# Altium PCB powerRegulator.PcbDoc
Units mil, origin at the board's own origin, x right, y up, seen from the top; angles counter-clockwise.
Board outline 2710 x 2100 mil, 2 copper layers (Top Layer, Bottom Layer), stack 62.8 mil thick; 15 components, 31 nets, 65 pads, 15 vias.
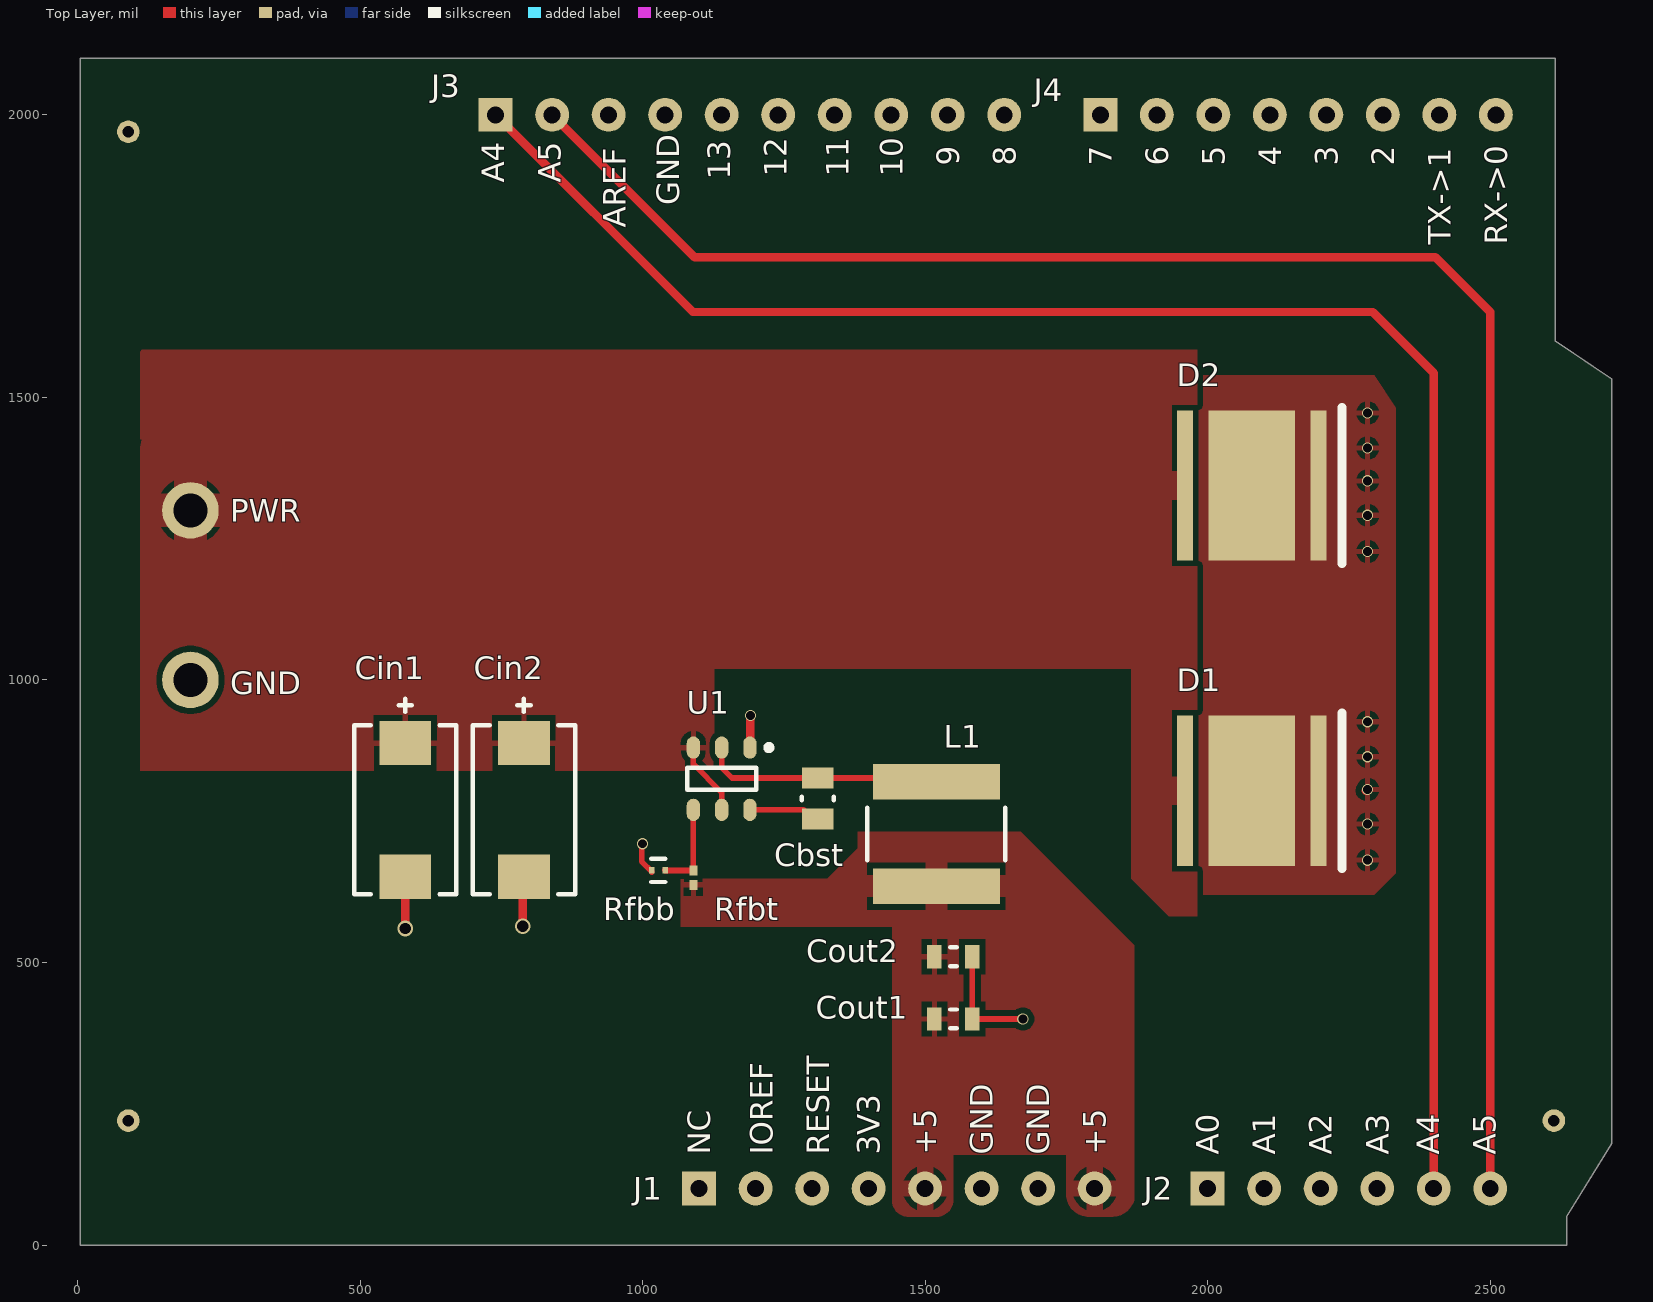
[diagram p0: Top Layer view]
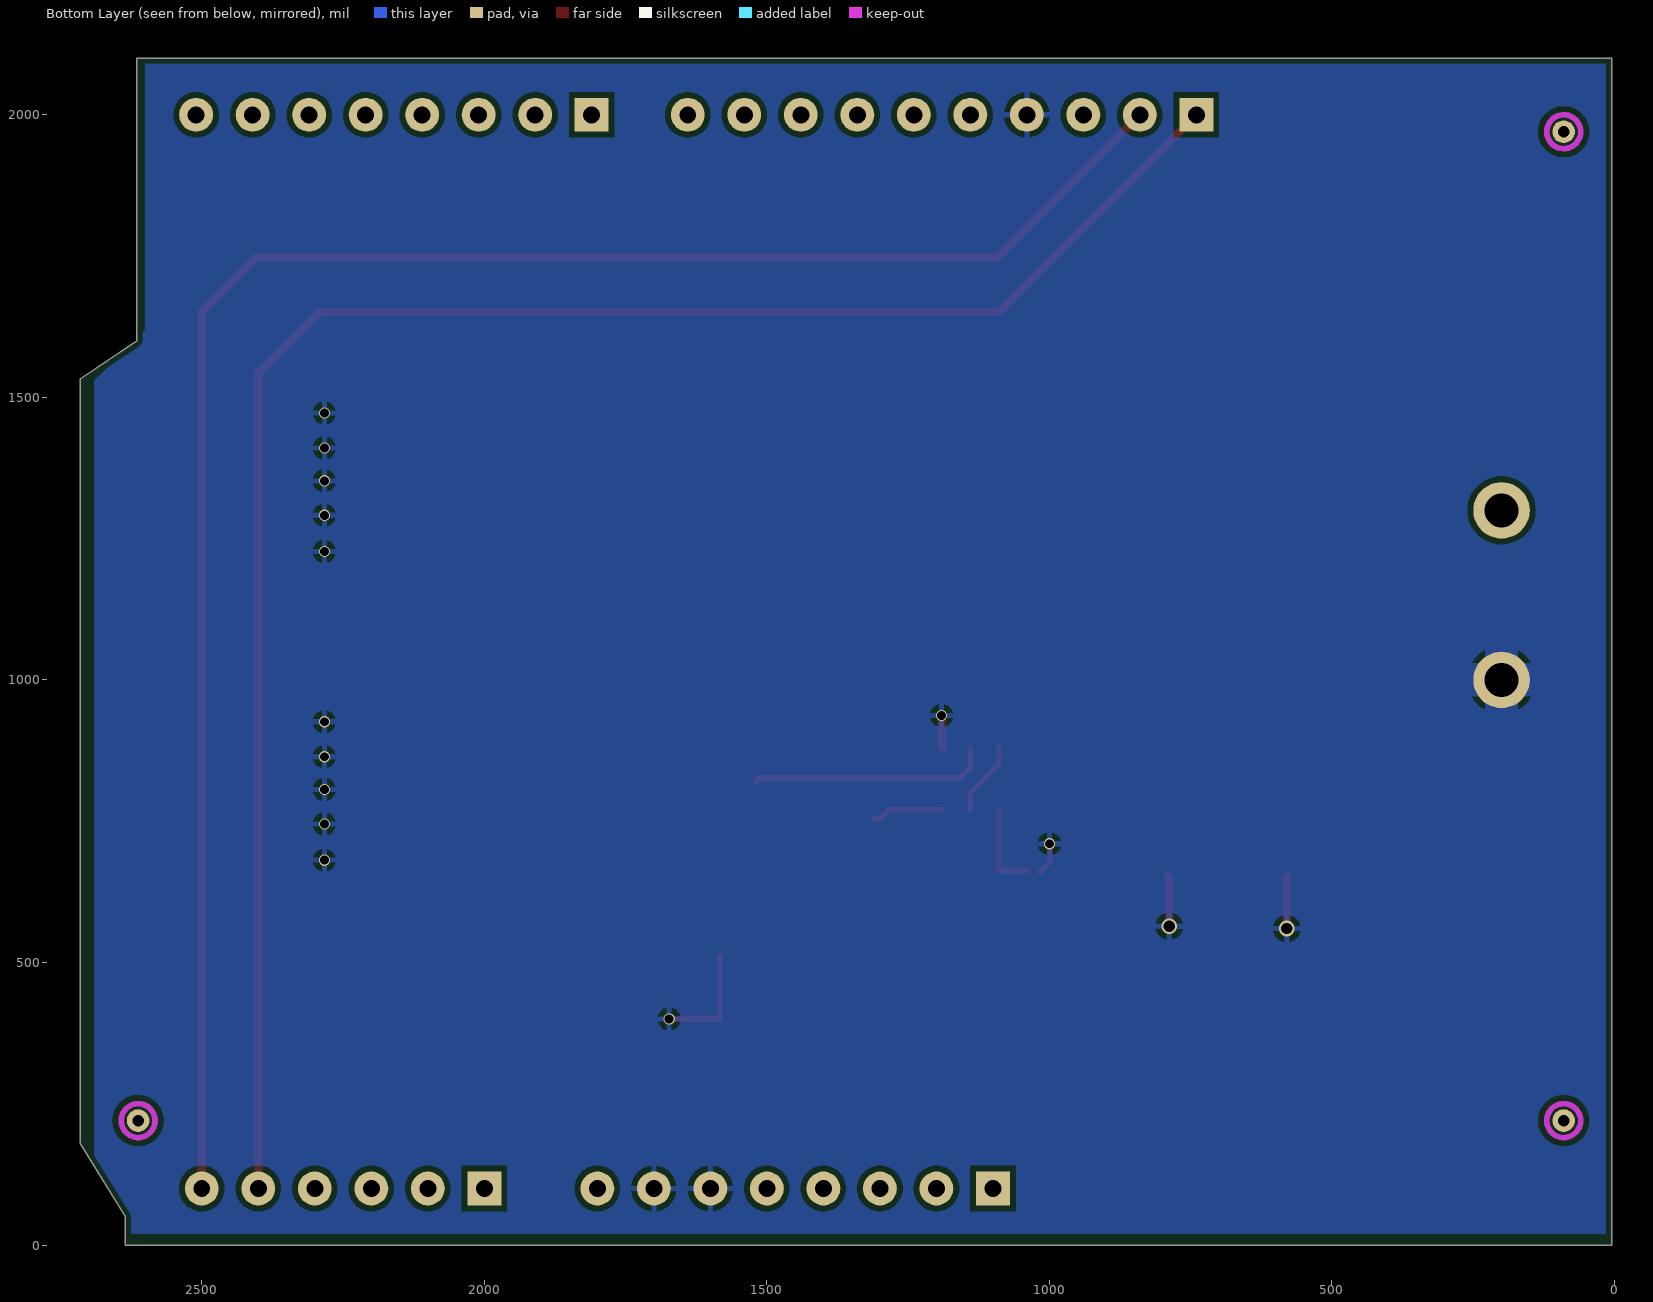
[diagram p1: Bottom Layer view, seen from below]

## Layer stack, top to bottom
Top Solder: solder mask 0.4, Solder Resist, Dk 3.5
Top Layer: signal copper 1.4
Dielectric 1: dielectric 60, FR-4, Dk 4.8
Bottom Layer: signal copper 1.4
Bottom Solder: solder mask 0.4, Solder Resist, Dk 3.5

## Board outline
5,0 2635,0 2635,50 2715,180 2715,285 2715,1532.35 2615,1600 2615,1655 2615,2100 5,2100

## Design rules (kind name [scope] priority, off if disabled: settings)
BoardOutlineClearance [All] p1: gap=10 ignorepadtopadclearanceinfootprint=FALSE
Clearance [All] p1: gap=10 ignorepadtopadclearanceinfootprint=TRUE except(0: Arc-Hole Track-Hole SMDPad-Hole THPad-Hole Via-Hole Fill-Hole Poly-Hole Region-Hole Text-Hole; 4: Arc-THPad)
PolygonConnect [All] p1: connectstyle=Relief reliefconductorwidth=10 reliefentries=4 polygonreliefangle="90 Angle" airgapwidth=10
RoutingVias [All] p1: holewidth=20 width=28 viastyle="Through Hole" minholewidth=12 minwidth=20 maxholewidth=28 maxwidth=40
SolderMaskExpansion [All] p1: expansion=4 istentingtop=FALSE
Width [All] p1: maxlimit=20 minlimit=10 preferedwidth=15
30 further rules are at their usual default settings.

## Components (designator, comment, footprint, x,y, rotation, side; value= is the part's Value field where it differs from the comment)
Cbst "CC0805KRX7R8BB104" FP-CC0805-0_85-MFG 1310,790 r270 top value="100 nF"
Cin1 "T491D106K035AT" FP-T491D106K035AT-MFG 580,770 r90 top
Cin2 "T491D106K035AT" FP-T491D106K035AT-MFG 790,770 r90 top
Cout1 "C1608X5R1A226M080AC" CAPC1608X100X20ML10 1550,400 r180 top
Cout2 "C1608X5R1A226M080AC" CAPC1608X100X20ML10 1550,510 r180 top
D1 "MKRAWT-00-0000-0D0HG235H" CREE-MK-R-2_V 2078,804 r0 top
D2 "MKRAWT-00-0000-0D0HG235H" CREE-MK-R-2_V 2078,1344 r0 top
J1 "SSQ-108-03-T-S" SSQ-108-03-T-S-Footprint-1#1 1450,100 r0 top
J2 "SSQ-106-03-T-S" SSQ-108-03-T-S-Footprint-1#2 2000,100 r0 top
J3 "SSQ-110-03-T-S" SSQ-108-03-T-S-Footprint-1#3 1190,2000 r0 top
J4 "SSQ-108-03-T-S" SSQ-108-03-T-S-Footprint-1#1 2160,2000 r0 top
L1 "NR6028T4R7M" FP-NR6028-MFG 1520,727.48 r270 top
Rfbb "ERJ-1GNF1002C" FP-ERJ1G-MFG 1028,663 r0 top value=10kΩ
Rfbt "CRCW020156K2FNED" RESC0603X28X15NL05T05 1090,650 r270 top
U1 "TPS562200DDCR" SOIC127P280X110-6N 1140,825.12 r270 top

## Footprints (in the part's own frame and the unit in brackets; to place one, negate y for a bottom-side part, rotate by r counter-clockwise, add the part's x,y. Pads: shape width x height; smd on the part's side, far side on the other; paste and mask are expansions set on the pad)
CAPC1608X100X20ML10 [mm] "Chip Capacitor, 2-Leads, Body 1.70x0.90mm, IPC Low Density"
  rect 0.65x1.05 smd: 1(-0.85,0) 2(0.85,0)
  silkscreen extent -0.15,-0.43 0.15,0.43, body extent -0.85,-0.45 0.85,0.45, height 1
CREE-MK-R-2_V [mm] "SMD, 2-Leads, Body 7x7mm, Thermal Pad 3.9x6.76mm"
  rect 0.7x6.76 smd: 1(-3,0) 2(3,0)
  rect 3.9x6.76 smd: 3(0,0)
  silkscreen extent 4.05,-3.5 4.05,3.5, body extent -3.5,-3.5 3.5,3.5, height 4.1
FP-CC0805-0_85-MFG [mm]
  rect 0.95x1.4 smd paste+0 mask+0: 1(-0.925,0) 2(0.925,0)
  silkscreen extent -0.08,-0.72 0.08,0.72, body extent -1.6,-1.05 1.6,1.05, height 0.25
FP-ERJ1G-MFG [mm]
  rect 0.25x0.3 smd paste+0 mask+0: 1(-0.3,0) 2(0.3,0)
  silkscreen extent -0.32,-0.53 0.32,0.53, body extent -0.53,-0.27 0.53,0.27, height 0.25
FP-NR6028-MFG [mm]
  rect 1.6x5.7 smd paste+0 mask+0: 1(-2.35,0) 2(2.35,0)
  silkscreen extent -1.17,-3.1 1.17,3.1, body extent -3.25,-3.2 3.25,3.2, height 0.25
FP-T491D106K035AT-MFG [mm]
  rect 1.99x2.33 smd paste+0 mask+0: 1(-3.01,0) 2(3.01,0)
  silkscreen extent -3.8,-2.3 5,2.3, body extent -4.13,-2.42 4.13,2.42, height 0.25
RESC0603X28X15NL05T05 [mm] "Chip Resistor, 2-Leads, Body 0.60x0.30mm, IPC Medium Density"
  rect 0.45x0.35 smd: 1(-0.325,0) 2(0.325,0)
  body extent -0.33,-0.17 0.33,0.18, height 0.28
SOIC127P280X110-6N [mm] "SOIC, 6-Leads, Body 2.90x1.60mm, Pitch 1.27mm, IPC Medium Density"
  oval 1x0.6 smd: 1(-1.4,1.27) 2(-1.4,0) 3(-1.4,-1.27) 4(1.4,-1.27) 5(1.4,0) 6(1.4,1.27)
  silkscreen extent -1.52,-1.55 0.5,2.25, body extent -1.91,-1.55 1.9,1.55, height 1.1
SSQ-108-03-T-S-Footprint-1#1 [mil]
  rect 60x60 hole 30: 1(-350,0)
  round 60 hole 30: 2(-250,0) 3(-150,0) 4(-50,0) 5(50,0) 6(150,0) 7(250,0) 8(350,0)
SSQ-108-03-T-S-Footprint-1#2 [mil]
  rect 60x60 hole 30: 1(0,0)
  round 60 hole 30: 2(100,0) 3(200,0) 4(300,0) 5(400,0) 6(500,0)
SSQ-108-03-T-S-Footprint-1#3 [mil]
  rect 60x60 hole 30: 1(-450,0)
  round 60 hole 30: 2(-350,0) 3(-250,0) 4(-150,0) 5(-50,0) 6(50,0) 7(150,0) 8(250,0) 9(350,0) 10(450,0)

## Part data
Cbst: library part CMP-1036-04410-2, "CAP CER 0.1UF 25V X7R 0805", Capacitance="100 nF", Manufacturer=Yageo, Package=CC0805-0.85, Temperature="-30°C to +85°C", Temperature Characteristic=X7R, Temperature Range High=+85°C, Temperature Range Low=-30°C, Tolerance=0.1, Voltage Rating="25 V", Automotive=No, Category=Cap, ComponentLink2Description=Datasheet, ComponentLink2URL=http://www.yageo.com/documents/recent/UPY-GPHC_Y5V_6.3V-to-50V_8.pdf, Device Class L1="Passive Components", Device Class L2=Capacitors, Device Class L3="Ceramic Capacitors", Digikey Description="CAP CER 0.1UF 25V X7R 0805", Footprint Url=http://www.yageo.com/exep/pages/download/literatures/UPY-C_GEN_24.pdf, Height=0.95mm, Ipc Land Pattern Name=CAPC200125X85, Lead Free=Yes, Manufacturer Part Number=CC0805KRX7R8BB104, Material=Ceramic, Mouser Description="Multilayer Ceramic Capacitors MLCC - SMD/SMT 100nF 25V X7R 10%", Octopart=https://octopart.com/cc0805krx7r8bb104-yageo-39467766, RoHS=TRUE
Cin1 Cin2: library part CMP-2000-07580-2, "CAP TANT 10UF 10% 35V 2917", Capacitance=10uF, Case Code (Imperial)=2917, Case Code (Metric)=7343, Dielectric Material=Tantalum, ESR (Equivalent Series Resistance)=1R, Leakage Current=3.5uA, Max Operating Temperature=125°C, Min Operating Temperature=-55°C, Package Quantity=1, Tolerance=20%, Voltage=35V, Case/Package=2917, Depth=4.3mm, Dissipation Factor=6%, Features="General Purpose", Height=2.8mm, Height - Seated (Max)=0.122inch, Lead Free="Lead Free", Length=7.3mm, Life (Hours)=2000Hour, Mount="Surface Mount", Number of Pins=2, Packaging="Tape and Reel", Polarity=Polar, Radiation Hardening=No, REACH SVHC="No SVHC", RoHS Compliant=Yes, Termination=SMD/SMT, Voltage Rating=35V, Voltage Rating (DC)=35V, Width=4.3mm
Cout1 Cout2: library part CMP-2000-05441-1, "Chip Capacitor, 22 uF, +/- 20%, 10 V, -55 to 85 degC, 0603 (1608 Metric), RoHS, Tape and Reel", Capacitance=22µF, Manufacturer=TDK, Operating Temperature=-55degC~85degC, Package / Case=0603(1608Metric), Package Description="2-Pin Surface Mount Device, Body 1.6 x 0.8 mm", Package Reference=603, PCN Part Number=MLCCPartNumberChange30/Nov/2012, Ratings=-, Standard Package=1, Temperature Coefficient=X5R, Tolerance=±20%, Voltage - Rated=10V, Applications=GeneralPurpose, Category=Capacitors, Datasheet URL=http://download.siliconexpert.com/pdfs/2015/4/21/15/54/45/779/tdk_/manual/37024850441143360mlcc_commercial_general_en.pdf, Datasheet Version=Mar-15, Design Resources=20WNon-IsolatedBuckLEDDriverUsingPLLNK460KG, Family=CeramicCapacitors, Features=-, Height - Seated (Max)=-, Kits=445-9014-KIT-ND-KITMLCC100PF-22UF060310-50V, Lead Spacing=-, Lead Style=-, Manufacturer URL=http://www.tdk.com/, Mounting Type=SurfaceMount,MLCC, Online Catalog=CSeries,GeneralPurpose, Other Names=445-9077-1, Packaging=CutTape(CT), Product Training Modules=CSeriesGeneralApplicationsSEAT,CCV,andTVCLDesignToolsGuidetoReplacinganElectrolyticCapacitorwithanMLCC, RoHS Information=RoHSCertificate-MLCC, Series=C, Size / Dimension="0.063\"Lx0.031\"W(1.60mmx0.80mm)", Thickness (Max)="0.035\"(0.90mm)"
D1 D2: library part CMP-2100-00977-1, "LED, White, 12 V, 2-Pin SMD, RoHS, Tape and Reel"
J1 J4: library part CMP-00003-2, "Headers & Wire Housings Tiger Buy Socket Strip with Square Tails, 0.100 Pitch", Color=Black, Connector Type=Receptacle, Contact Material=Bronze, Contact Plating=Tin, Contact Type="Female Socket", Gender=Female, Height=8.51mm, Housing Color=Black, Housing Material=Plastic, Lead Free="Lead Free", Length=20.8mm, Mount="Through Hole", Number Of Contacts=8, Number of Positions=8, Number Of Rows=1, Packaging=Bulk, Pitch=0.1inch, Radiation Hardening=No, RoHS Compliant=Yes, Series=SSQ, Termination=Solder, Width=2.41mm
J2: library part CMP-00006-2, "Headers & Wire Housings Tiger Buy Socket Strip with Square Tails, 0.100 Pitch", Color=Black, Connector Type=Receptacle, Contact Material=Bronze, Contact Plating=Tin, Contact Type="Female Socket", Gender=Female, Height=8.51mm, Housing Color=Black, Housing Material=Plastic, Lead Free="Lead Free", Length=15.8mm, Mount="Through Hole", Number Of Contacts=6, Number of Positions=6, Number Of Rows=1, Packaging=Bulk, Pitch=0.1inch, Radiation Hardening=No, RoHS Compliant=Yes, Series=SSQ, Termination=Solder, Width=2.41mm
J3: library part CMP-00007-1, "Headers & Wire Housings Tiger Buy Socket Strip with Square Tails, 0.100 Pitch", Color=Black, Package Quantity=1, Connector Type=Receptacle, Contact Material=Bronze, Contact Plating=Tin, Contact Type="Female Socket", Gender=Female, Height=8.51mm, Housing Color=Black, Housing Material=Plastic, Lead Free="Lead Free", Length=25.9mm, Mount="Through Hole", Number Of Contacts=10, Number of Positions=10, Number Of Rows=1, Packaging=Bulk, Pitch=0.1inch, Radiation Hardening=No, RoHS Compliant=Yes, Series=SSQ, Termination=Solder, Width=2.41mm
L1: library part CMP-14484-000037-2, "SMD Power Inductors 4.7uH ±20% 2.7A 40.3mΩ", Case/Package=2424, Current Rating=3A, DC Resistance (DCR)=40.3mR, Inductance=4.7uH, Inductance Tolerance=20%, Max Operating Temperature=120°C, Min Operating Temperature=-25°C, Package Quantity=2000, Resistor Type=Wirewound, Saturation Current=2.7A, Self Resonant Frequency=39MHz, Test Frequency=100kHz, Core Material=Ferrite, Depth=6.2mm, Halogen Free="Halogen Free", Height=2.8mm, Height - Seated (Max)=0.11inch, Lead Free="Lead Free", Length=0.236inch, Max DC Current=3A, Mount="Surface Mount", Number of Pins=2, Packaging="Tape and Reel", Radiation Hardening=No, RMS Current (Irms)=3A, RoHS Compliant=Yes, Series=NR, Shielding=Shielded, Termination=SMD/SMT, Tolerance=20%, Width=0.236inch
Rfbb: library part CMP-2004-03445-2, "RES SMD 10K OHM 1% 1/20W 0201", Manufacturer="Panasonic Electronic Components", Package=ERJ1G, Power Rating=0.05W, Resistance=10kΩ, Temperature="-55°C to +125°C", Temperature Coefficient=200ppm/°C, Temperature Range High=+125°C, Temperature Range Low=-55°C, Tolerance=1%, Voltage Rating=25V, Automotive=Yes, Automotive Grade="Grade 1", Category=Res, ComponentLink2Description=Datasheet, ComponentLink2URL=https://industrial.panasonic.com/cdbs/www-data/pdf/RDA0000/AOA0000C304.pdf, Composition="Thick Film", Device Class L1="Passive Components", Device Class L2=Resistors, Device Class L3="Chip SMD Resistors", Digikey Description="RES SMD 10K OHM 1% 1/20W 0201", Footprint Url=https://industrial.panasonic.com/cdbs/www-data/pdf/RDA0000/DMA0000COL17.pdf, Height=0.26mm, Lead Free=Yes, Manufacturer Part Number=ERJ-1GNF1002C, Mouser Description="Thick Film Resistors - SMD 0201 10Kohm 1% HalogenFree AEC-Q200", Octopart=https://octopart.com/erj-1gnf1002c-panasonic-55419697, RoHS=TRUE, Series=ERJ
Rfbt: library part CMP-2004-00723-1, Manufacturer="Vishay Dale", Part Number=CRCW020156K2FNED
U1: library part CMP-00005-3, "Buck Switching Regulator IC Positive Adjustable 0.765V 1 Output 2A SOT-23-6 Thin, TSOT-23-6", Case/Package=SOT-23-6, Max Input Voltage=17V, Max Operating Temperature=125°C, Max Output Current=2A, Max Output Voltage=7V, Min Input Voltage=4.5V, Min Operating Temperature=-40°C, Min Output Voltage=765mV, Package Quantity=3000, Quiescent Current=230uA, Switching Frequency=650kHz, Contact Plating=Tin, Lead Free="Lead Free", Mount="Surface Mount", Number of Outputs=1, Number of Pins=6, Operating Supply Voltage=17V, Output Configuration=Positive, Output Current=2A, Output Type=Adjustable, Output Voltage=7V, Packaging="Tape and Reel", Radiation Hardening=No, Reach SVHC Compliant=Yes, RoHS Compliant=Yes, Series="D-CAP2™, Eco-Mode™", Synchronous Rectifier=Yes, Weight=0.00127oz

## Free pads (board coordinates)
  round 40 hole 20 mask+20: 0(90,220.08) 0(90,1970) 0(2612.61,220.08)
  round 100 hole 60: 20(200,1000) 20(200,1300)

## Via types
v1: diameter 20, hole 15.75, Top Layer to Bottom Layer, 13 vias
v2: diameter 28, hole 20, Top Layer to Bottom Layer, 2 vias

## Nets (pads, with @x,y where several pads share a name; then routed paths per layer and width w, separated by ;. In a path a pad name is that pad's centre, name@x,y a point inside that pad or via, vN(x,y) a via of type N, cw(c..) or ccw(c..) an arc to the next point about the centre after c; other vN are vias at no path point)
3.3V: J1.4
+5: Cout1.2 Cout2.2 J1.5 J1.8 L1.2 Rfbt.2
+12: Cin1.2 Cin2.2 D1.1 D2.1 pad.20@200,1300 U1.3 U1.5 | length 130.9
  Top Layer w10: U1.3 1090,851 1140,801 U1.5
A0: J2.1
A1: J2.2
A2: J2.3
A3: J2.4
A4: J2.5 J3.1 | length 3292.3
  Top Layer w15: J3.1 1089,1651 2292,1651 2400,1543 J2.5
A5: J2.6 J3.2 | length 3355.6
  Top Layer w15: J3.2 1092,1748 2403,1748 2500,1651 J2.6
AREF: J3.3
D0: J4.8
D1: J4.7
D2: J4.6
D3: J4.5
D4: J4.4
D5: J4.3
D6: J4.2
D7: J4.1
D8: J3.10
D9: J3.9
D10: J3.8
D11: J3.7
D12: J3.6
D13: J3.5
GND: Cin1.1 Cin2.1 Cout1.1 Cout2.1 D1.2 D1.3 D2.2 D2.3 J1.6 J1.7 J3.4 pad.20@200,1000 Rfbb.1 U1.1 | length 498.9
  Top Layer w10: v1(1000,710) 998.29,708.29 998.29,678.91 1016.38,660.83 Rfbb.1@1016.38,660 ; Cout2.1 Cout1.1 v1(1673,400)
  Top Layer w15: v2(580,560) Cin1.1 ; v2(788,564) 788,649.5 Cin2.1 ; U1.1 1190.5,880.74 1190.5,936.5 v1(1191,937) ; v1@2279.65,804 2281.65,806 v1(2283,806)
  other v1: 2283,681 2283,745 2283,864 2283,926 2283,1227.26 2283,1291.26 2283,1352.26 2283,1410.26 2283,1472.26
IOREF: J1.2
NC: J1.1
NetCbst_1: Cbst.1 L1.1 U1.2 | length 425.6
  Top Layer w10: U1.2 1140,845 1158.58,826.42 1513.58,826.42 L1.1
NetCbst_2: Cbst.2 U1.6 | length 126.8
  Top Layer w10: U1.6 1284.72,770 1301.14,753.58 Cbst.2
NetRfbb_2: Rfbb.2 Rfbt.1 U1.4 | length 157.6
  Top Layer w10: Rfbb.2 1039.81,662.87 1039.89,662.8 Rfbt.1 U1.4
RESET: J1.3

## Polygon pours and split planes (outlines as drawn)
GND on Bottom Layer "GND_L02_P000" (solid, pour order 0): 10,2090 10,20 2635,20 2635,52.72 2661.82,102.89 2690,145.07 2690,1530 2600,1620 2600,2090
GND on Top Layer "GND_L01_P003" (solid, pour order 3): 1984,1547 1984,620 2295,620 2333,658 2333,1481.56 2294.62,1539 1991,1539
+12 on Top Layer "+12_L01_P001" (solid, pour order 1): 114,1425 111,1422 111,839 1127,839 1127,1020 1865,1020 1865,648 1931,582 1982,582 1982,1584 114,1584 111,1581 111,1412
+5 on Top Layer "+5_L01_P002" (solid, pour order 2): 1068,648 1327,648 1381,702 1381,731 1669,731 1870,530 1870,79.19 cw(c1830,92) 1830,50 1790,50 cw(c1790,90) 1750,90 1750,160 1830,160 1500,160 1550,160 1550,80 cw(c1520,80) 1520,50 1470,50 cw(c1470,78) 1442,78 1442,218 1442,563 1068,563 1068,647

## Keep-outs
Bottom Layer:
  circle w10: c2612.61,220.08 r30
  circle w10: c90,220.08 r30
  circle w10: c90,1970 r30

## Silkscreen, mask and mechanical layers (free items; w line width, h text height)
Top Overlay:
  text "9" at 1560,1910 h40 r90
  text "8" at 1660,1910 h40 r90
  text "7" at 1830,1910 h40 r90
  text "6" at 1930,1910 h40 r90
  text "5" at 2030,1910 h40 r90
  text "4" at 2130,1910 h40 r90
  text "3" at 2230,1910 h40 r90
  text "2" at 2330,1910 h40 r90
  text "12" at 1255,1890 h40 r90
  text "11" at 1365,1890 h40 r90
  text "10" at 1460,1890 h40 r90
  text "13" at 1155,1885 h40 r90
  text "A4" at 755,1880 h40 r90
  text "A5" at 855,1880 h40 r90
  text "GND" at 1065,1840 h40 r90
  text "AREF" at 970,1800 h40 r90
  text "TX->1" at 2430,1770 h40 r90
  text "RX->0" at 2530,1770 h40 r90
  text "PWR" at 270,1280 h40
  text "GND" at 270,975 h40
  text "NC" at 1120,160 h40 r90
  text "IOREF" at 1230,160 h40 r90
  text "RESET" at 1330,160 h40 r90
  text "3V3" at 1420,160 h40 r90
  text "+5" at 1520,160 h40 r90
  text "GND" at 1620,160 h40 r90
  text "GND" at 1720,160 h40 r90
  text "+5" at 1820,160 h40 r90
  text "A0" at 2020,160 h40 r90
  text "A1" at 2120,160 h40 r90
  text "A2" at 2220,160 h40 r90
  text "A3" at 2320,160 h40 r90
  text "A4" at 2410,160 h40 r90
  text "A5" at 2510,160 h40 r90